# EAGLE board V7Print (EAGLE 5.12), part 1 of 2
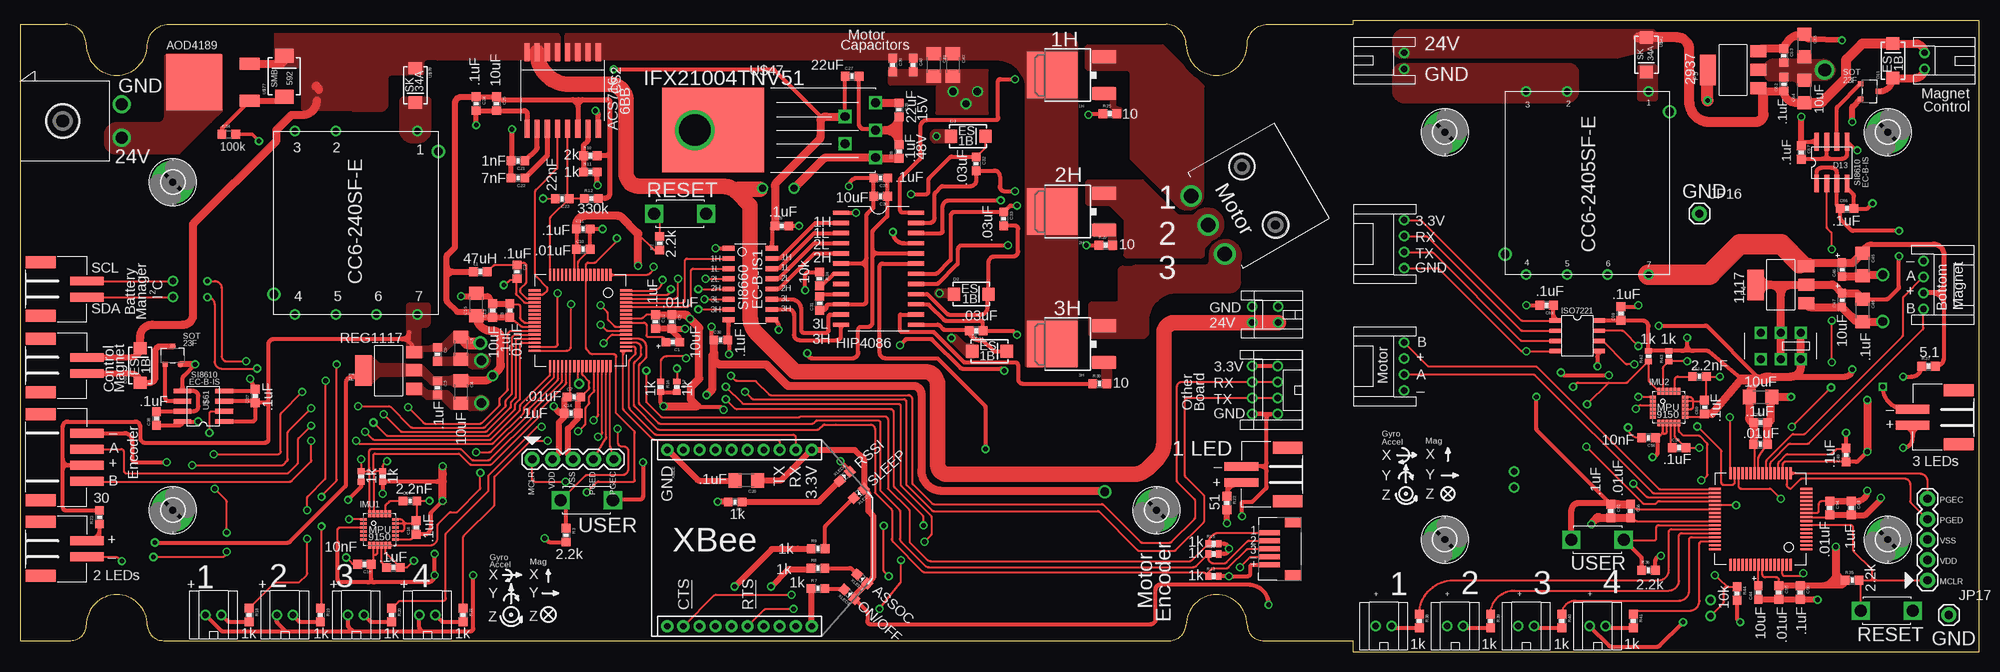
[diagram p0: board, top side]
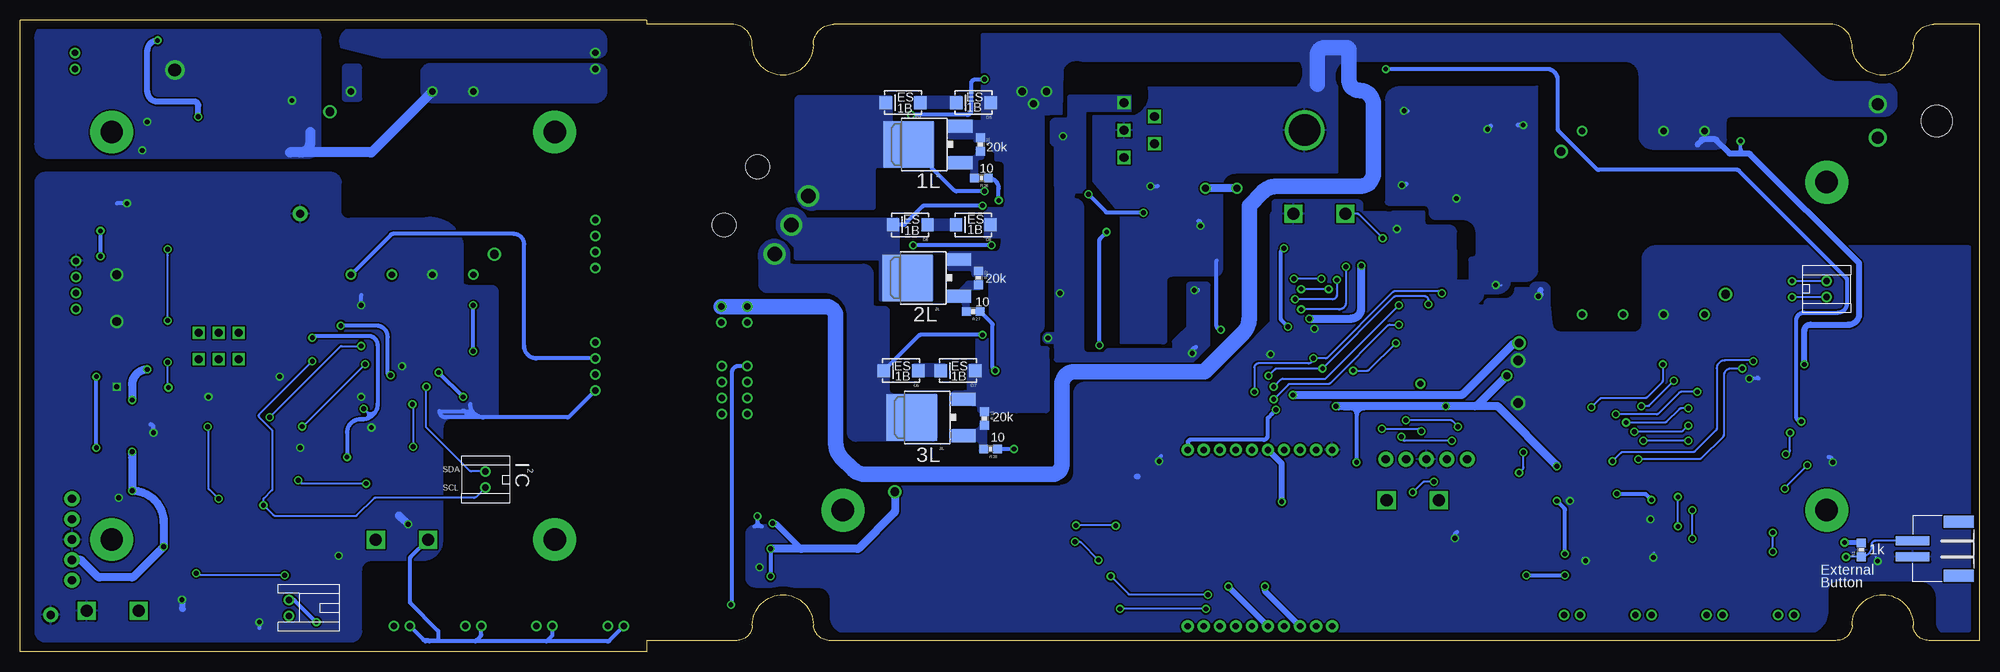
[diagram p1: board, bottom side, seen from below]

Size 244.35 x 78.74 mm. Coordinates in mm from the lower left corner, seen from the top.
Outline: 0,78.22 5.71,78.22 arc-90 8.25,75.68 arc180 15.87,75.68 arc-90 18.8,78.22 142.88,78.22 arc-90 145.41,75.68 arc180 153.03,75.68 arc-90 155.57,78.22 160.78,78.22 166.24,78.22 166.24,78.74 244.35,78.74 244.35,0 166.24,0 166.24,1.38 160.78,1.38 154.94,1.38 arc-90 153.03,3.29 arc180 145.41,3.29 arc-90 143.13,1.38 17.91,1.38 arc-90 15.87,3.29 arc180 8.25,3.29 arc-90 6.35,1.38 0,1.38 0,78.22
Copper layers (1*16): Top 0.035mm / dielectric 1.5mm / Bottom 0.035mm
Design rules "default": minimum track width 10mil, minimum drill 24mil, track to track 8mil, track to pad 8mil, pad to pad 8mil, via to via 8mil, smd to smd 8mil, copper to edge 40mil, drill to drill 8mil, minimum pad ring 10mil, minimum via ring 8mil, stop-mask expansion 4mil, vias tented up to drill 0mil, thermal gap 10mil

## Footprints (pad centres in the part's own frame; a part is rotated, then mirrored left to right if it is on the bottom)
DPAK = smd 5.791 x 6.274: D 0,1.587 | smd 1.6 x 3: G -2.286,-4.851; S 2.286,-4.851
JST-2-PH-SMD = smd 1.1 x 4.2: 1 -1,-7.7; 2 1,-7.7 | smd 1.5 x 3.7: P$1 -3.35,-1.95; P$4 3.35,-1.95
0603-POL = smd 1.1 x 1: + 0.85,0; - -0.85,0
0603 = smd 1.1 x 1.1: 1 -0.85,0; 2 0.85,0
1206 = smd 1.6 x 1.8: 1 -1.4,0; 2 1.4,0
SOIC16-W = smd 0.65 x 2.25: 1 -4.445,-4.75; 2 -3.175,-4.75; 3 -1.905,-4.75; 4 -0.635,-4.75; 5 0.635,-4.75; 6 1.905,-4.75; 7 3.175,-4.75; 8 4.445,-4.75; 9 4.445,4.75; 10 3.175,4.75; 11 1.905,4.75; 12 0.635,4.75; 13 -0.635,4.75; 14 -1.905,4.75; 15 -3.175,4.75; 16 -4.445,4.75
SMA-DIODE = smd 1.52 x 1.63: A -2.15,0; C 2.15,0
SOIC8-N = smd 2.2 x 0.6: 1 -2.6,1.905; 2 -2.6,0.635; 3 -2.6,-0.635; 4 -2.6,-1.905; 5 2.6,-1.905; 6 2.6,-0.635; 7 2.6,0.635; 8 2.6,1.905
SOIC-8 = smd 1.5 x 0.55: 1 -2.7,1.905; 2 -2.7,0.635; 3 -2.7,-0.635; 4 -2.7,-1.905; 5 2.7,-1.905; 6 2.7,-0.635; 7 2.7,0.635; 8 2.7,1.905
2,8-PAD = drill 2.8 pad 5.334 round: B2,8 0,0
LGA24_4X4 = smd 0.8 x 0.35: 1 -2,1.25; 2 -2,0.75; 3 -2,0.25; 4 -2,-0.25; 5 -2,-0.75; 6 -2,-1.25; 13 2,-1.25; 14 2,-0.75; 15 2,-0.25; 16 2,0.25; 17 2,0.75; 18 2,1.25 | smd 0.35 x 0.85: 7 -1.25,-1.975; 8 -0.75,-1.975; 9 -0.25,-1.975; 10 0.25,-1.975; 11 0.75,-1.975; 12 1.25,-1.975; 19 1.25,1.975; 20 0.75,1.975; 21 0.25,1.975; 22 -0.25,1.975; 23 -0.75,1.975; 24 -1.25,1.975
JST-4-PH-SMD = smd 1.1 x 4.2: 1 -3,-7.7; 2 -1,-7.7; 3 1,-7.7; 4 3,-7.7 | smd 1.5 x 3.7: P$1 -5.35,-1.95; P$2 5.35,-1.95
JST-5-SH = smd 0.6 x 2.7: 1 2,4; 2 1,4; 3 0,4; 4 -1,4; 5 -2,4 | smd 1.2 x 2: P$6 -3.3,1; P$7 3.3,1
JST-2-PH-TH = drill 0.8 round: 1 -1,-6.35; 2 1,-6.35
1X01_TEST = drill 0.762 round: 1 0,0
JST-2-PH-V = drill 0.8 round: 1 -1,0; 2 1,0
JST-4-PH-TH = drill 0.8 round: 1 -3,-6.35; 2 -1,-6.35; 3 1,-6.35; 4 3,-6.35
JST-4-PH-V = drill 0.8 round: 1 -3,0; 2 -1,0; 3 1,0; 4 3,0
TE-MINIMATENLOK-2 = drill 1.48 round: 1 -2.07,12.67; 2 2.07,12.67 | hole 3.91: 0,5.33
MOLEX-3-MINIFITJR-RA = drill 1.803 round: 1 4.191,13.538; 2 0,13.538; 3 -4.191,13.538 | hole 3: -4.204,6.248; 4.204,6.248
1X01 = drill 1.016 pad 1.88 round: 1 0,0
SOT23F = smd 0.6 x 0.65: D 0,1.125; G -0.95,-1.125; S 0.95,-1.125
SOIC24-W = smd 0.533 x 1.981: 1 -6.985,-4.686; 2 -5.715,-4.686; 3 -4.445,-4.686; 4 -3.175,-4.686; 5 -1.905,-4.686; 6 -0.635,-4.686; 7 0.635,-4.686; 8 1.905,-4.686; 9 3.175,-4.686; 10 4.445,-4.686; 11 5.715,-4.686; 12 6.985,-4.686; 13 6.985,4.686; 14 5.715,4.686; 15 4.445,4.686; 16 3.175,4.686; 17 1.905,4.686; 18 0.635,4.686; 19 -0.635,4.686; 20 -1.905,4.686; 21 -3.175,4.686; 22 -4.445,4.686; 23 -5.715,4.686; 24 -6.985,4.686
SOT223 = smd 1.499 x 2.007: 1 -2.261,-3.15; 2 0.025,-3.15; 3 2.311,-3.15 | smd 3.81 x 2.007: 4 0,3.15
CC6-2405SF-E = drill 0.8 round: 1 -11.43,7.62; 2 -11.43,-2.54; 3 -11.43,-7.62; 4 11.43,-7.62; 5 11.43,-2.54; 6 11.43,2.54; 7 11.43,7.62 | drill 1.1 round: P$9 8.89,-10.25; P$10 -8.89,10.25
1X05-PICKIT3 = drill 1.016 pad 1.88 round: MCLR 1.27,-1.016; PGEC 11.43,-1.016; PGED 8.89,-1.016; VDD 3.81,-1.016; VSS 6.35,-1.016
0402 = smd 0.7 x 0.9: 1 -0.65,0; 2 0.65,0
TACTILE_SWITCH = drill 1.5 square: 1 -3.25,0; 2 3.25,0
SLIDE_SWITCH = drill 1 square: 1 -2.489,1.651; 2 0,1.651; 3 2.489,1.651; 4 2.489,-1.651; 5 0,-1.651; 6 -2.489,-1.651
TQFP64_10X10 = smd 1.5 x 0.3: 1 -5.7,3.75; 2 -5.7,3.25; 3 -5.7,2.75; 4 -5.7,2.25; 5 -5.7,1.75; 6 -5.7,1.25; 7 -5.7,0.75; 8 -5.7,0.25; 9 -5.7,-0.25; 10 -5.7,-0.75; 11 -5.7,-1.25; 12 -5.7,-1.75; 13 -5.7,-2.25; 14 -5.7,-2.75; 15 -5.7,-3.25; 16 -5.7,-3.75; 33 5.7,-3.75; 34 5.7,-3.25; 35 5.7,-2.75; 36 5.7,-2.25; 37 5.7,-1.75; 38 5.7,-1.25; 39 5.7,-0.75; 40 5.7,-0.25; 41 5.7,0.25; 42 5.7,0.75; 43 5.7,1.25; 44 5.7,1.75; 45 5.7,2.25; 46 5.7,2.75; 47 5.7,3.25; 48 5.7,3.75 | smd 0.3 x 1.5: 17 -3.75,-5.7; 18 -3.25,-5.7; 19 -2.75,-5.7; 20 -2.25,-5.7; 21 -1.75,-5.7; 22 -1.25,-5.7; 23 -0.75,-5.7; 24 -0.25,-5.7; 25 0.25,-5.7; 26 0.75,-5.7; 27 1.25,-5.7; 28 1.75,-5.7; 29 2.25,-5.7; 30 2.75,-5.7; 31 3.25,-5.7; 32 3.75,-5.7; 49 3.75,5.7; 50 3.25,5.7; 51 2.75,5.7; 52 2.25,5.7; 53 1.75,5.7; 54 1.25,5.7; 55 0.75,5.7; 56 0.25,5.7; 57 -0.25,5.7; 58 -0.75,5.7; 59 -1.25,5.7; 60 -1.75,5.7; 61 -2.25,5.7; 62 -2.75,5.7; 63 -3.25,5.7; 64 -3.75,5.7
SOIC16-N = smd 0.6 x 1.55: 1 -4.445,-2.7; 2 -3.175,-2.7; 3 -1.905,-2.7; 4 -0.635,-2.7; 5 0.635,-2.7; 6 1.905,-2.7; 7 3.175,-2.7; 8 4.445,-2.7; 9 4.445,2.7; 10 3.175,2.7; 11 1.905,2.7; 12 0.635,2.7; 13 -0.635,2.7; 14 -1.905,2.7; 15 -3.175,2.7; 16 -4.445,2.7
TO220-5 = drill 1.1 square: 1 3.81,-3.404; 2 0,-1.702; 3 3.81,0; 4 0,1.702; 5 3.81,3.404 | smd 12.7 x 10.541: PAD -16.434,0 | drill 3.937 round: PAD2 -18.72,0
D-PAK = smd 7.01 x 7.01: D 0,0 | smd 1.499 x 2.515: G -2.286,-6.909; S 2.286,-6.909
SMB-DIODE = smd 1.75 x 2.3: A -2.54,0; C 2.54,0
XBEE-SILK = drill 0.8 pad 1.524 round: 1 -11,20; 2 -11,18; 3 -11,16; 4 -11,14; 5 -11,12; 6 -11,10; 7 -11,8; 8 -11,6; 9 -11,4; 10 -11,2; 11 11,2; 12 11,4; 13 11,6; 14 11,8; 15 11,10; 16 11,12; 17 11,14; 18 11,16; 19 11,18; 20 11,20
0603-DIODE = smd 1.1 x 1.1: AN -0.85,0; CAT 0.85,0

## Placement (x,y rotation side)
1H  IRLR024  [DPAK]  130.3,71.87 90 top
1L  IRLR024  [DPAK]  131.95,63.23 90 bottom
2H  IRLR024  [DPAK]  130.3,54.85 90 top
2L  IRLR024  [DPAK]  132.08,46.6 90 bottom
3H  IRLR024  [DPAK]  130.3,38.34 90 top
3L  IRLR024  [DPAK]  131.57,29.2 90 bottom
BUTTON  [JST-2-PH-SMD]  0.64,12.81 270 bottom
C1  10uF  [0603-POL]  81.41,38.6 180 top
C2  .1uF  [0603]  61.98,47.36 270 top
C3  .1uF  [0603]  52.07,32.88 270 top
C4  10uF  [1206]  54.99,32.37 270 top
C5  10uF  [1206]  54.99,37.83 270 top
C6  .1uF  [0603]  52.07,37.07 270 top
C7  .01uF  [0603]  69.09,31.74 0 top
C8  .01uF  [0603]  61.09,42.53 90 top
C9  .01uF  [0603]  81.28,41.14 270 top
C10  .01uF  [0603]  70.23,50.15 0 top
C11  .1uF  [0603]  70.23,52.69 0 top
C12  .1uF  [0603]  79.25,41.14 270 top
C13  .1uF  [0603]  58.93,42.53 90 top
C14  .1uF  [0603]  68.73,29.71 0 top
C15  10uF  [1206]  56.9,43.29 90 top
C16  .1uF  [0603]  49.4,15.48 90 top
C17  2.2nF  [0603]  48.64,18.78 0 top
C18  10nF  [0603]  42.94,10.91 180 top
C19  .1uF  [0603]  46.57,10.49 0 top
C20  .1uF  [1206]  90.56,21.32 180 top
C21  1nF  [0603]  62.1,61.2 180 top
C22  7nF  [0603]  62.1,59.04 180 top
C23  22nF  [0603]  67.6,56.46 180 top
C24  .1uF  [0603]  56.9,68.31 270 top
C25  10uF  [0603]  59.44,68.31 270 top
C26  .1uF 48V  [0603]  109.6,62.34 90 top
C27  22uF  [0603]  103.76,71.74 0 top
C28  22uF 15V  [0603]  109.6,67.55 270 top
C29  .1uF  [0603]  95,53.07 0 top
C30  .1uF  [0603]  87.38,38.85 0 top
C31  DNI  [0603]  99.7,43.42 90 top
C32  .03uF 15V  [0603]  119.25,60.82 270 top
C33  .03uF 15V  [0603]  122.68,53.96 270 top
C34  .03uF 15V  [0603]  119.25,39.99 180 top
C35  .1uF  [0603]  107.31,59.04 180 top
C36  10uF  [0603]  107.31,56.76 180 top
C37  .1uF  [0603]  29.34,31.86 90 top
C38  .1uF  [0603]  17.02,29.07 90 top
C39  .01uF  [0603]  108.84,73.14 270 top
C40  .1uF  [0603]  111.38,73.14 270 top
C41  1uF  [1206]  113.92,73.14 270 top
C42  10uF  [1206]  116.33,73.14 270 top
C43  .1uF  [0603]  228.35,17.91 270 top
C44  10uF  [0603-POL]  216.79,7.37 90 top
C45  .1uF  [1206]  229.74,48.26 270 top
C46  10uF  [0603-POL]  227.2,47.62 90 top
C47  10uF  [0603-POL]  227.2,43.81 90 top
C48  .1uF  [1206]  229.74,42.55 270 top
C49  .1uF  [0603]  227.71,24.51 90 top
C50  .1uF  [0603]  222,7.37 270 top
C51  .1uF  [0603]  198.37,17.53 270 top
C52  .1uF  [0603]  217.04,28.57 0 top
C53  .01uF  [0603]  217.03,25.84 0 top
C54  .01uF  [0603]  225.68,17.91 270 top
C55  .01uF  [0603]  219.33,7.37 270 top
C56  .01uF  [0603]  200.84,17.53 270 top
C57  10uF  [1206]  217.04,31.75 0 top
C58  10nF  [0603]  203.07,26.67 180 top
C59  .1uF  [0603]  206.88,25.4 0 top
C60  .1uF  [0603]  210.06,30.48 90 top
C61  2.2nF  [0603]  209.42,34.29 0 top
C62  .1uF 24V  [0603]  219.96,70.74 90 top
C63  .1uF 24V  [0603]  219.96,74.3 270 top
C64  10uF 24V  [1206]  222.5,69.85 90 top
C65  10uF 24V  [1206]  222.5,75.56 270 top
C66  .1uF  [0603]  227.84,55.24 0 top
C67  .1uF  [0603]  222.12,62.23 270 top
C68  .1uF  [0603]  190.37,43.18 180 top
C69  .1uF  [0603]  199.64,42.16 90 top
CS2  ACS716KLATR-6BB-T  [SOIC16-W]  67.67,69.96 180 top
D1  ES1B  [SMA-DIODE]  120.9,37.45 0 top
D2  ES1B  [SMA-DIODE]  118.62,44.56 0 top
D3  ES1B  [SMA-DIODE]  118.24,64.25 0 top
D4  ES1B  [SMA-DIODE]  134.24,68.44 180 bottom
D5  ES1B  [SMA-DIODE]  125.45,68.44 180 bottom
D6  ES1B  [SMA-DIODE]  134.49,35.04 180 bottom
D7  ES1B  [SMA-DIODE]  127.38,35.04 180 bottom
D8  ES1B  [SMA-DIODE]  133.35,53.2 180 bottom
D9  ES1B  [SMA-DIODE]  125.48,53.2 180 bottom
D10  ES1B  [SMA-DIODE]  14.99,35.67 90 top
D11  ES1B  [SMA-DIODE]  233.55,73.66 90 top
D13  DIGITAL-ISOLATOR-1CHSOIC8-N  [SOIC8-N]  225.93,60.96 90 top
D15  ISO7221SMD  [SOIC-8]  194.18,39.37 0 top
H1  MOUNT-PAD-ROUND2.8  [2,8-PAD]  19.05,58.53 0 top
H2  MOUNT-PAD-ROUND2.8  [2,8-PAD]  19.05,17.64 0 top
H3  MOUNT-PAD-ROUND2.8  [2,8-PAD]  141.73,17.64 0 top
H4  MOUNT-PAD-ROUND2.8  [2,8-PAD]  177.67,64.77 0 top
H5  MOUNT-PAD-ROUND2.8  [2,8-PAD]  232.92,64.77 0 top
H6  MOUNT-PAD-ROUND2.8  [2,8-PAD]  177.67,13.97 0 top
H7  MOUNT-PAD-ROUND2.8  [2,8-PAD]  232.92,13.97 0 top
IMU1  MPU-9150  [LGA24_4X4]  44.83,15.23 0 top
IMU2  MPU-9150  [LGA24_4X4]  205.61,30.48 0 top
J2  [JST-4-PH-SMD]  0.64,24.24 90 top
J5  [JST-5-SH]  159.77,12.81 90 top
J7  [JST-2-PH-TH]  160.02,42.02 270 top
JP1  M01TEST  [1X01_TEST]  69.72,33.39 0 top
JP2  [JST-2-PH-SMD]  0.64,45.2 90 top
JP3  [JST-2-PH-V]  19.05,45.2 90 bottom
JP4  [JST-4-PH-TH]  160.02,32.63 270 top
JP5  [JST-4-PH-V]  156.84,32.63 270 top
JP6  [JST-2-PH-V]  24.13,4.56 180 top
JP7  [JST-2-PH-V]  33.02,4.56 180 top
JP8  [JST-2-PH-V]  41.91,4.56 180 top
JP9  [JST-2-PH-V]  50.8,4.56 180 top
JP10  [TE-MINIMATENLOK-2]  0,66.15 270 top
JP11  [JST-2-PH-SMD]  160.02,22.09 270 top
JP12  [JST-2-PH-V]  156.92,42.02 270 top
JP13  [JST-2-PH-SMD]  0.64,12.81 90 top
JP14  [JST-2-PH-SMD]  0.64,35.67 90 top
JP15  [MOLEX-3-MINIFITJR-RA]  159.88,59.96 120 top
JP16  M01PTH  [1X01]  209.42,54.61 0 top
JP17  M01PTH  [1X01]  240.54,4.57 0 top
JP18  [JST-2-PH-SMD]  243.71,29.21 270 top
JP19  [JST-2-PH-V]  178.94,3.17 180 top
JP20  [JST-2-PH-V]  187.83,3.17 180 top
JP21  [JST-2-PH-V]  170.05,3.17 180 top
JP22  [JST-2-PH-V]  196.72,3.17 180 top
JP23  [JST-2-PH-V]  186.31,21.46 270 bottom
JP24  [JST-4-PH-TH]  166.24,35.56 90 top
JP25  [JST-4-PH-TH]  243.71,45.72 270 top
JP26  [JST-2-PH-TH]  243.84,73.66 270 top
JP27  [JST-4-PH-TH]  166.24,50.8 90 top
JP28  [JST-2-PH-TH]  166.24,73.66 90 top
JP29  [JST-2-PH-TH]  204.47,5.46 270 bottom
L1  47uH  [0603]  57.4,47.36 0 top
M1  N-MOSSOT23F  [SOT23F]  19.05,36.94 0 top
M2  N-MOSSOT23F  [SOT23F]  230.63,69.85 270 top
MD1  HIP4086  [SOIC24-W]  107.06,47.74 270 top
P1  LINEAR-REG1117  [SOT223]  45.97,35.04 90 top
P2  DC-DC-CONVERTER1.2A  [CC6-2405SF-E]  41.91,53.45 270 top
P3  DC-DC-CONVERTER1.2A  [CC6-2405SF-E]  195.45,58.42 270 top
P4  LINEAR-REG1117  [SOT223]  219.58,45.72 90 top
P5  LINEAR-REGLM2937  [SOT223]  213.61,72.52 90 top
PROG  [1X05-PICKIT3]  62.61,25.01 0 top
PROG_1  [1X05-PICKIT3]  236.85,7.62 90 top
R1  1k  [0603]  14.73,12.69 90 bottom
R2  2.2k  [0603]  79.76,50.91 90 top
R3  2.2k  [0603]  68.11,14.52 270 top
R4  10k  [0402]  42.54,21.83 270 top
R5  10k  [0402]  45.21,21.83 270 top
R6  1k  [0603]  89.18,18.66 180 top
R7  1k  [0603]  99.5,7.86 0 top
R8  1k  [0603]  99.5,10.4 0 top
R9  1k  [0603]  99.52,12.83 0 top
R10  2k  [0603]  71.12,61.84 0 top
R11  1k  [0603]  71.12,59.8 0 top
R12  330k  [0603]  71.25,56.5 0 top
R13  1k  [0402]  148.84,9.39 0 top
R14  1k  [0402]  148.84,12.18 0 top
R15  1k  [0402]  148.84,13.45 0 top
R16  1k  [0402]  79.88,33.01 270 top
R17  1k  [0402]  81.92,33.01 270 top
R18  1k  [0603]  28.58,4.56 270 top
R19  1k  [0603]  37.46,4.56 270 top
R20  1k  [0603]  46.35,4.56 270 top
R21  1k  [0603]  55.24,4.56 270 top
R22  51  [0603]  150.5,18.53 270 top
R23  30  [0603]  9.91,16.75 90 top
R24  10k  [0603]  99.7,46.47 270 top
R25  10  [0603]  135.89,67.04 0 top
R26  10  [0603]  124.46,59.04 180 bottom
R27  10  [0603]  125.48,42.41 180 bottom
R28  10  [0603]  123.32,25.26 180 bottom
R29  10  [0603]  135.38,50.66 0 top
R30  10  [0603]  134.62,33.39 0 top
R31  20k  [0603]  124.59,63.23 270 bottom
R32  20k  [0603]  124.84,46.6 270 bottom
R33  20k  [0603]  124.08,29.07 270 bottom
R34  100k  [0603]  26.04,64.52 0 top
R35  2.2k  [0603]  228.47,8.89 0 top
R36  2.2k  [0603]  203.07,10.16 0 top
R37  5.1  [0603]  238,35.56 0 top
R38  1k  [0603]  174.5,3.81 270 top
R39  1k  [0603]  183.39,3.81 270 top
R40  1k  [0603]  192.28,3.81 270 top
R41  1k  [0603]  201.17,3.81 270 top
R42  10k  [0402]  203.07,36.83 90 top
R43  10k  [0402]  205.61,36.83 90 top
R44  10k  [0603]  214.12,7.24 270 top
RESET1  TACTILE_SWITCH  [TACTILE_SWITCH]  82.3,54.6 0 top
RESET2  TACTILE_SWITCH  [TACTILE_SWITCH]  232.79,5.08 0 top
SW1  SLIDE_SWTHROUGHHOLE  [SLIDE_SWITCH]  219.58,38.1 180 top
U$1  DSPIC33EP512MC806  [TQFP64_10X10]  69.85,41.26 270 top
U$2  DSPIC33EP512MC806  [TQFP64_10X10]  217.04,16.51 180 top
U$42  SK34A  [SMA-DIODE]  202.82,74.42 270 top
U$46  DIGITAL-ISOLATOR-6CHSI8660EC-B-IS1  [SOIC16-N]  91.06,45.83 270 top
U$47  IFX21004TNV51  [TO220-5]  102.87,65.01 0 top
U$61  DIGITAL-ISOLATOR-1CHSOIC8-N  [SOIC8-N]  22.86,30.59 180 top
U$75  AOD4189  [D-PAK]  21.73,70.99 90 top
U$77  10V  [SMB-DIODE]  32.94,71.73 90 top
U$78  SK34A  [SMA-DIODE]  49.3,70.6 270 top
USER  TACTILE_SWITCH  [TACTILE_SWITCH]  196.72,13.97 0 top
USER1  TACTILE_SWITCH  [TACTILE_SWITCH]  70.68,18.86 180 top
XBEE  XBEETH  [XBEE-SILK]  78.73,14.16 270 top
XLED1  [0603-DIODE]  103.43,7.15 138 top
XLED2  [0603-DIODE]  104.58,19.72 222 top
XLED3  [0603-DIODE]  105.02,9.07 138 top
XLED4  [0603-DIODE]  102.83,21.86 42 top

## Library data of the parts
1H 1L 2H 2L 3H 3L BUTTON C1-C69 CS2 D1-D11 D13 H1-H7 IMU1 IMU2 J2 J5 J7 JP1-JP29 L1 M1 M2 MD1 P1-P5 PROG PROG_1 R1-R33 R35-R44 RESET1 RESET2 SW1 U$1 U$2 U$42 U$46 U$47 U$61 U$78 USER USER1 XBEE XLED1-XLED4 = GibbotV5
D15 U$75 = GibbotV6
R34 U$77 = Gibbot v4

## Nets
1HO: 1H.G R25.2
1HS: 1H.S 1L.D C32.2 D4.C JP15.1 MD1.23
1LO: 1L.G R26.2 R31.2
2HO: 2H.G R29.2
2HS: 2H.S 2L.D C33.1 D8.C JP15.2 MD1.18
2LO: 2L.G R27.2 R32.2
3.3V: C3.1 C4.1 C7.1 C8.1 C9.1 C10.1 C11.1 C12.1 C13.1 C14.1 C15.1 C16.1 C18.1 C20.1 C24.1 C25.1 CS2.14 IMU1.3 IMU1.8 IMU1.9 IMU1.13 JP4.1 JP5.1 JP6.2 JP7.2 JP8.2 JP9.2 L1.1 P1.2 P1.4 PROG.VDD R1.2 R2.1 R4.2 R5.2 R10.2 R12.2 R16.2 R17.2 U$1.10 U$1.26 U$1.38 U$1.57 USER1.1 XBEE.1 XLED1.AN XLED2.AN XLED3.AN
3.3V1: C43.1 C49.1 C50.1 C51.1 C52.1 C53.1 C54.1 C55.1 C56.1 C57.1 C58.1 C60.1 C69.1 D15.8 IMU2.3 IMU2.8 IMU2.9 IMU2.13 JP19.2 JP20.2 JP21.2 JP22.2 JP29.1 PROG_1.VDD R35.1 R42.2 R43.2 SW1.1 SW1.6 U$2.10 U$2.19 U$2.26 U$2.38 U$2.57 USER.1
3HO: 3H.G R30.2
3HS: 3H.S 3L.D C34.1 D6.C JP15.3 MD1.15
3LO: 3L.G R28.2 R33.2
5V: C45.1 C46.+ JP24.3 JP25.3 P3.7 P4.3 R37.2
5V1: C27.1 C29.1 C38.1 U$46.16 U$47.4 U$61.8
5V2: C5.1 C6.1 C30.1 C37.1 J2.2 J5.5 P1.3 P2.7 R13.2 R14.2 R15.2 R22.2 R23.2 U$46.1 U$61.1 U$61.3
15V: C28.1 C35.1 C36.1 D1.A D2.A D3.A MD1.20 R24.1 U$47.5
24V: C26.1 CS2.5 CS2.6 CS2.7 CS2.8 D10.C J7.2 JP12.2 JP14.2 U$47.1 U$75.S U$77.C U$78.A
24V1: C62.1 C64.1 D11.C JP26.1 JP28.2 P5.1 U$42.A
CTS: U$1.54 XBEE.12
FAULT: C23.1 CS2.13 R12.1 U$1.16
GND1: 1L.S 2L.S 3L.S C26.2 C27.2 C28.2 C29.2 C31.1 C35.2 C36.2 C38.2 C39.2 C40.2 C41.2 C42.2 D5.A D7.A D9.A J7.1 JP10.1 JP12.1 M1.S MD1.6 MD1.10 P2.2 P2.3 R31.1 R32.1 R33.1 R34.2 U$46.9 U$47.3 U$47.PAD U$47.PAD2 U$61.5 U$61.7
GND2: BUTTON.2 C1.- C2.2 C3.2 C4.2 C5.2 C6.2 C7.2 C8.2 C9.2 C10.2 C11.2 C12.2 C13.2 C14.2 C15.2 C16.2 C17.2 C18.2 C19.2 C20.2 C21.2 C22.2 C23.2 C24.2 C25.2 C30.2 C37.2 CS2.9 CS2.16 IMU1.1 IMU1.11 IMU1.15 IMU1.17 IMU1.18 J2.4 J5.4 JP4.4 JP5.4 JP11.1 JP13.1 P1.1 P2.5 PROG.VSS R3.2 R11.2 RESET1.2 U$1.9 U$1.20 U$1.25 U$1.41 U$46.8 U$61.4 XBEE.10 XLED4.CAT
GND3: C43.2 C44.- C45.2 C46.- C47.- C48.2 C49.2 C50.2 C51.2 C52.2 C53.2 C54.2 C55.2 C56.2 C57.2 C58.2 C59.2 C60.2 C61.2 C66.2 C69.2 D13.4 D15.5 IMU2.1 IMU2.11 IMU2.15 IMU2.17 IMU2.18 JP16.1 JP17.1 JP18.1 JP24.1 JP25.1 P3.5 P4.1 PROG_1.VSS R36.2 R44.2 RESET2.2 U$2.9 U$2.20 U$2.25 U$2.41
GND4: C62.2 C63.2 C64.2 C65.2 C67.2 D13.5 D13.7 JP28.1 M2.S P3.2 P3.3 P5.2 P5.4
HALL1: J5.1 R15.1 U$1.53
HALL2: J5.2 R14.1 U$1.52
HALL3: J5.3 R13.1 U$1.51
I_SENSE: CS2.12 U$1.18
IMU_INT1: IMU1.12 U$1.35
IMU_INT2: IMU2.12 U$2.35
LED1: R18.1 U$1.28
LED2: R19.1 U$1.27
LED3: R20.1 U$1.45
LED4: R21.1 U$1.46
LED5: R41.1 U$2.46
LED6: R40.1 U$2.45
LED7: R39.1 U$2.44
LED8: R38.1 U$2.43
LOW_MAG: D13.2 U$2.30
LOW_MAGA: JP25.2 U$2.23
LOW_MAGB: JP25.4 U$2.22
MCLR1: PROG.MCLR R2.2 RESET1.1 U$1.7
MCLR_2: PROG_1.MCLR R35.2 RESET2.1 U$2.7
MOT_TEMP: JP29.2 R44.1 U$2.62
MOTA: JP24.2 U$2.34
MOTB: JP24.4 U$2.33
MOTOR+: 1H.D 2H.D 3H.D C39.1 C40.1 C41.1 C42.1 CS2.1 CS2.2 CS2.3 CS2.4
N$1: C44.+ U$2.56
N$2: R7.2 XLED1.CAT
N$3: R8.2 XLED3.CAT
N$4: C1.+ U$1.56
N$5: R9.2 XLED2.CAT
N$6: C2.1 L1.2 U$1.19
N$7: JP10.2 U$75.D
N$8: BUTTON.1 R1.1 U$1.30
N$9: JP1.1 U$1.40
N$10: C47.+ C48.1 P4.2 SW1.2 SW1.5
N$11: P4.4
N$12: P2.1 U$78.C
N$13: JP18.2 R37.1
N$14: JP22.1 R41.2
N$15: R34.1 U$75.G U$77.A
N$16: C17.1 IMU1.20
N$17: JP20.1 R40.2
N$18: C19.1 IMU1.10
N$19: R6.2 XBEE.6
N$20: R6.1 XLED4.AN
N$21: R7.1 XBEE.20
N$22: JP19.1 R39.2
N$23: JP21.1 R38.2
N$24: C59.1 IMU2.10
N$25: R8.1 XBEE.15
N$26: R9.1 XBEE.13
N$27: C61.1 IMU2.20
N$28: CS2.15 R10.1 R11.1
N$29: C21.1 CS2.10
N$30: C63.1 C65.1 C67.1 D13.8 P5.3
N$31: C22.1 CS2.11
N$32: JP6.1 R18.2
N$33: D13.6 M2.G
N$34: JP7.1 R19.2
N$35: JP8.1 R20.2
N$36: JP9.1 R21.2
N$37: D11.A JP26.2 M2.D
N$38: MD1.24 R25.1
N$39: MD1.22 R26.1
N$40: MD1.21 R27.1
N$41: MD1.19 R28.1
N$42: MD1.17 R29.1
N$43: JP11.2 R22.1
N$44: JP13.2 R23.1
N$45: MD1.14 R30.1
N$46: C68.1 D15.1 JP27.4
N$47: C31.2 MD1.9
N$48: MD1.7 R24.2
N$49: D4.A D5.C
N$50: D6.A D7.C
N$51: D8.A D9.C
N$52: C32.1 D3.C MD1.1
N$53: D15.2 JP27.3
N$54: D15.3 JP27.2
N$55: C34.2 D1.C MD1.13
N$56: C33.2 D2.C MD1.16
N$57: M1.G U$61.6
N$58: D10.A JP14.1 M1.D
N$59: C68.2 D15.4 JP27.1
N$60: P3.1 U$42.C
PGEC1_2: PROG_1.PGEC U$2.17
PGEC2: PROG.PGEC U$1.48
PGED1_2: PROG_1.PGED U$2.18
PGED2: PROG.PGED U$1.47
PRE3.3: C66.1 D13.1 D13.3
PWM1H: U$1.61 U$46.2
PWM1HO: MD1.2 U$46.15
PWM1L: U$1.60 U$46.3
PWM1LO: MD1.3 U$46.14
PWM2H: U$1.63 U$46.5
PWM2HO: MD1.5 U$46.12
PWM2L: U$1.62 U$46.4
PWM2LO: MD1.4 U$46.13
PWM3H: U$1.1 U$46.7
PWM3HO: MD1.12 U$46.10
PWM3L: U$1.64 U$46.6
PWM3LO: MD1.11 U$46.11
RTS: U$1.55 XBEE.16
RX1: U$1.50 XBEE.2
RX2: JP4.2 JP5.2 R17.1 U$1.32
RX3: D15.6 U$2.31
SCL1: IMU1.23 JP2.2 JP3.2 R5.1 U$1.37
SCL2: IMU2.23 JP23.2 R43.1 U$2.37
SDA1: IMU1.24 JP2.1 JP3.1 R4.1 U$1.36
SDA2: IMU2.24 JP23.1 R42.1 U$2.36
TOPMAGA: J2.3 U$1.33
TOPMAGB: J2.1 U$1.34
TOPMAGCON: U$1.29 U$61.2
TX1: U$1.49 XBEE.3
TX2: JP4.3 JP5.3 R16.1 U$1.31
TX3: D15.7 U$2.32
USER: R3.1 U$1.44 USER1.2
USER1: R36.1 U$2.42 USER.2

## Tracks (layer width: path | path; a pad name or v marks a point on that pad's centre or on a via)
1HO
  pour Top (no thermals): 136.14,69.84 135.64,69.84 arc90 135.25,69.46
  pour Top (no thermals): 133.98,70.35 136.27,70.35 arc-90 136.52,70.09 136.52,68.31 arc90 137.03,67.81 137.16,67.81 arc-90 137.29,67.68 137.29,66.79 arc-90 137.16,66.66 136.52,66.66 arc-90 136.27,66.92 136.27,67.55 136.11,67.71 arc-45 136.02,67.94 136.02,68.82 134.24,68.82 arc-90 133.86,69.2
1HS  (via drill 0.6)
  Top 0.508: MD1.23 113.41,53.45 arc90 114.05,54.09 114.05,57.01 arc-45 114.14,57.23 114.84,57.93 arc-45 115.07,58.03 118.49,58.03 arc90 119.25,58.79 C32.2 121.5,59.97 arc-90 122.17,59.3 122.17,58.03 arc90 122.81,57.39 v124.08,57.39
  Bottom 0.508: v124.08,57.39 127.57,57.39 arc45 127.79,57.48 1L.D
  pour Bottom (no thermals): 130.68,66.03 arc90 130.56,65.9 130.56,60.57 arc90 130.68,60.44
  pour Top (no thermals): 144.27,58.56 arc-90 146.94,58.56 arc-90 146.94,55.64 arc-90 144.27,55.64 arc-90
  pour Bottom (no thermals): 144.27,58.56 arc-90 146.94,58.56 arc-90 146.94,55.64 arc-90 144.27,55.64 arc-90
  pour Bottom (no thermals): 133.22,65.9 130.56,65.9 130.56,65.39 130.56,60.44 131.32,60.44
  pour Bottom (no thermals): 130.81,65.9 arc90 130.56,65.65 130.56,60.95 arc90 130.94,60.57
  pour Bottom (no thermals): 130.94,65.9 arc90 130.56,65.52 130.56,60.95 arc90 131.06,60.44
  pour Top (no thermals): 135.23,75.56 133.25,75.56 arc90 132.88,75.2 132.88,72.95 arc90 133.29,72.54 137.96,72.54 arc-90 138.49,72.01 138.49,61.57 arc45 138.59,61.35 144.37,55.56 144.37,55.75 arc-45 144.47,55.97 147.02,58.52 147.02,58.03 arc-45 146.92,57.81 146.23,57.11 147.59,57.11 147.59,70.42 arc45 147.49,70.64 142.54,75.59
  pour Bottom (no thermals): 147.22,69.28 135.86,69.28 arc90 135.69,69.1 135.69,66.31 arc-90 135.43,66.05 130.56,66.05 arc90 130.43,65.93 130.43,60.64 arc90 130.66,60.41 137.43,60.41 arc-90 137.77,60.07 137.77,55.47 arc90 138.1,55.14 145.49,55.14 arc90 145.9,55.55 145.9,56.35 arc-90 146.67,57.12 147.47,57.12 arc90 147.62,57.28 147.62,68.64 arc90
1LO
  pour Bottom (no thermals): 124.59,62.85 124.84,62.85 arc-90 125.09,62.6 125.09,62.22 arc90 125.6,61.71 128.27,61.71 arc-90 128.4,61.58 128.4,60.44 arc-90 128.27,60.31 125.86,60.31 arc90 125.73,60.19 125.73,58.79 arc-90 125.6,58.66 125.09,58.66 arc-90 124.97,58.79 124.97,61.07 arc90 124.59,61.46 124.46,61.46 arc-90 124.21,61.71 124.21,62.73 arc-90 124.33,62.85
2HO
  pour Top (no thermals): 136.27,50.15 136.4,50.15 arc90 136.65,50.41 136.65,53.07 arc90 136.4,53.33 133.98,53.33 arc90 133.86,53.2 133.86,51.93 arc90 133.98,51.8 135.51,51.8 arc-90 135.76,51.55 135.76,50.28 arc90 135.89,50.15
2HS  (via drill 0.6)
  Top 0.508: MD1.18 114.17,47.1 arc45 114.39,47.2 115.98,48.79 arc45 116.08,49.01 116.08,54.34 arc-90 116.55,54.81 C33.1 123.39,55.52 arc-45 123.62,55.61 v124.33,55.61
  Bottom 0.508: D8.C 134.24,53.2 arc-45 134.02,53.29 131.79,55.52 arc45 131.57,55.61 v124.33,55.61
  pour Top (no thermals): 146.76,54.74 arc-90 149.43,54.74 arc-90 149.43,51.82 arc-90 146.76,51.82 arc-90
  pour Bottom (no thermals): 146.76,54.74 arc-90 149.43,54.74 arc-90 149.43,51.82 arc-90 146.76,51.82 arc-90
  pour Top (no thermals): 147.02,55.03 146.32,54.33 arc-45 146.1,54.24 142.65,54.24 138.46,58.43 arc45 138.23,58.52 135.81,58.52 133.39,58.52 arc90 133.03,58.17 133.03,56.05 arc90 133.39,55.69 135.77,55.69 arc-45 136,55.6 139.61,51.98 140.22,51.38 arc45 140.44,51.28 148.42,51.28 147.2,52.51 arc-45 147.1,52.73 147.1,54.94
  pour Top (no thermals): 135.69,55.69 137.34,55.69 arc-90 137.71,55.32 137.71,49.53 arc90 138.05,49.19 147.29,49.19 arc90 147.64,49.53 147.64,51.04 arc-90 147.88,51.28 147.88,53.82 arc90 147.33,54.37 144.53,54.37 arc-45 144.31,54.46 140.04,58.72 133.26,58.72 arc90 132.96,58.42 132.96,56.06 arc90 133.32,55.69
  pour Top (no thermals): 147.65,49.99 147.65,50.19 arc-45 147.74,50.41 149.21,51.88 149.21,52.75 arc45 149.12,52.98 147.22,54.88 147.22,54.04 arc-45 147.13,53.82 145.57,52.26 145.57,52.05 arc45 145.66,51.82 147.43,50.05
  pour Bottom (no thermals): 135.6,54.04 135.03,54.04 arc90 134.77,53.78 134.77,49.83 arc-90 134.4,49.47 130.78,49.47 arc90 130.54,49.23 130.54,43.92 arc90 130.72,43.74 136.94,43.74 arc90 137.1,43.89 137.1,48.58 arc-90 137.4,48.88 147.47,48.88 arc90 147.73,49.14 147.73,50.38 149.05,51.7 149.05,54.06 arc90 147.82,55.3 147.82,55.04 147.08,54.31 146.81,54.04 135.66,54.04
2LO
  pour Bottom (no thermals): 127.25,45.07 128.14,45.07 arc-90 128.52,44.69 128.52,43.93 arc-90 128.27,43.68 127.25,43.68 arc90 126.75,43.17 126.75,42.28 arc-90 126.49,42.02 126.11,42.02 arc-90 125.98,42.15 125.98,44.95 arc90 125.73,45.2 124.71,45.2 arc-90 124.46,45.45 124.46,45.96 arc-90 124.59,46.09 126.11,46.09 arc-45 126.33,46
3.3V  (via drill 0.6, 0.9)
  Top 0.254: U$1.10 69.1,49.74 arc-45 69.19,49.96 C10.1 | U$1.57 77.33,41.51 arc45 77.78,41.7 78.01,41.93 arc-45 78.24,42.02 79.15,42.02 arc-45 C12.1 | 67.97,32.02 arc45 68.06,31.79 C7.1 | 77.09,52.06 78.99,50.16 arc45 79.21,50.06 R2.1 | C8.1 62.42,40.61 arc45 62.64,40.51 U$1.26 | C15.1 56.9,42.32 | IMU1.13 48.62,13.98 arc45 48.84,14.07 C16.1 | 44.08,11.93 44.08,11.33 arc-45 43.99,11.11 C18.1 | 44.08,11.93 IMU1.8 | IMU1.9 44.58,12.43 arc-90 44.21,12.05 arc90 44.08,11.93 | IMU1.3 39.87,15.48 arc90 39.62,15.23 39.62,13.58 | C7.1 arc-45 68.2,31.83 | U$1.38 68.6,32.23 arc-45 68.51,32.01 C7.1
  Top 0.508: JP4.1 JP5.1 | v155.7,5.83 arc90 153.16,8.37 142.24,8.37 arc90 141.6,7.73 141.6,4.05 arc-90 140.97,3.42 106.05,3.42 arc-90 105.66,3.8 105.66,4.85 arc45 105.57,5.07 XLED1.AN | P1.4 arc90 42.8,35.01 42.8,34.4 arc-90 42.67,34.28 41.4,34.28 | C11.1 C10.1 | 41.4,34.28 arc90 42.16,35.04 42.16,33.9 arc-90 42.29,33.77 42.29,33.39 arc90 41.4,34.28 | C16.1 50.46,14.63 arc90 51.18,15.35 51.18,17.13 arc-45 51.27,17.35 v52.7,18.78 arc90 52.8,18.88 52.8,20.27 arc90 51.89,21.18 R5.2 v45.21,19.67 | 43.79,9.03 C18.1 | 44.2,8.62 arc-90 43.79,9.03 | 44.2,8.62 50.8,8.62 arc90 v51.69,9.51 v51.69,12.18 | 39.62,13.58 39.62,9 arc90 40,8.62 44.2,8.62 | 43.79,9.03 arc-90 43.38,8.62 | v40.89,18.91 42.45,20.47 arc45 42.54,20.69 R4.2 | 41.4,34.28 arc90 40.64,33.52 40.64,20.82 arc-45 40.55,20.6 33.65,13.69 arc-45 33.42,13.6 v16.83,13.6 arc45 16.89,13.58 | R17.2 R16.2 79.88,31.11 arc45 79.98,30.88 v80.26,30.59 | v56.52,9.51 56.52,2.91 arc-90 56.13,2.53 50.16,2.53 | 33.15,2.53 25.29,2.53 arc-45 25.07,2.62 JP6.2 | 33.15,2.53 41.53,2.53 | 41.53,2.53 50.16,2.53 | JP7.2 32.02,3.79 arc45 32.11,3.56 33.15,2.53 | JP8.2 40.91,3.28 arc45 41,3.05 41.53,2.53 | JP9.2 49.8,3.02 arc45 49.89,2.8 50.16,2.53 | 84.45,30.59 arc90 84.55,30.5 87.27,30.5 arc-45 87.5,30.41 v87.74,30.17 | 52.7,21.2 arc-90 52.69,21.18 | 52.7,22.15 arc-90 51.74,21.18 | v77.67,23.6 77.67,19.32 arc-90 77.32,18.96 74.03,18.96 arc90 USER1.1
  Top 0.61: C24.1 C25.1 59.68,68.91 arc45 59.91,68.82 68.96,68.82 | R12.2 72.9,56.5 arc90 73.53,57.14 73.53,62.09 | R10.2 73.02,61.84 arc45 73.47,62.02 73.53,62.09 | 68.96,68.82 69.6,68.82 | 70.1,68.82 73.28,68.82 arc-90 73.53,68.57 73.53,62.09 | 69.57,67.95 arc45 69.39,68.4 68.96,68.82 | 69.57,67.95 69.57,68.03 | 69.76,68.47 arc45 69.57,68.03 | 70.1,68.82 69.76,68.47 | 69.6,68.82 70.1,68.82 | 69.6,68.82 69.6,68.31 | 69.57,67.95 CS2.14 | 69.76,68.47 arc45 69.57,68.03
  Top 0.762: C8.1 C13.1 57.24,41.68 arc-45 57.02,41.77 C15.1 | 57.32,42.32 56.9,42.32 54.7,42.32 arc-45 54.48,42.41 53.31,43.58 arc-45 53.21,43.81 53.21,46.85 | 53.21,46.85 53.21,47.61 | 53.21,46.85 53.53,47.17 arc-45 53.98,47.36 53.85,47.36 arc-90 53.21,47.99 | 53.21,47.61 53.21,47.99 | 53.21,47.61 arc90 53.34,47.48 arc90 53.59,47.23 53.59,47.36 L1.1 | C24.1 55.08,69.16 arc90 54.23,68.31 54.23,50.54 arc-45 54.14,50.31 53.31,49.48 arc45 53.21,49.26 53.21,47.99 | C9.1 C12.1 | C14.1 67.57,29.71 arc-45 67.12,29.89 v66.56,30.61 | C14.1 67.88,31.38 arc-90 C7.1 | C20.1 94.76,21.32 arc45 94.98,21.42 XBEE.1 103.92,25.16 arc-45 104.14,25.07 105.13,24.08 arc-45 105.22,23.86 XLED2.AN arc-45 XLED2.AN 105.67,19.84 arc-45 105.77,19.61 105.77,17.7 arc45 105.86,17.47 106.31,17.02 arc-45 106.4,16.8 106.4,9.38 arc-45 106.31,9.16 XLED3.AN | PROG.VDD 67.09,24.66 arc45 67.18,24.88 67.18,28.43 arc-45 67.28,28.66 67.79,29.17 arc45 67.88,29.39 C14.1 | XLED1.AN 104.06,6.78 arc-45 104.15,7 XLED3.AN | 105.77,8.75 arc-45 105.67,8.52 XLED3.AN
  Top 1.016: C4.1 57.77,33.77 arc45 58.67,34.14 v58.93,34.4 59.69,35.17 arc45 59.94,35.78 59.94,39.1 arc90 59.05,39.99 58.8,39.99 arc-90 C15.1 | C11.1 69.38,53.24 arc-90 70.48,54.34 74.54,54.34 arc-45 74.99,54.16 76.9,52.25 | 77.09,52.06 76.9,52.25 | C9.1 82.97,41.98 arc-45 83.19,41.89 v83.57,41.52 84.71,40.37 84.71,34.02 83.69,33.01 83.69,31.36 84.45,30.59 v80.26,30.59 | v52.7,18.78 52.7,21.2 52.7,22.15 v52.7,23.1 | v77.09,48.12 77.09,52.06 | 77.09,52.06 arc90 76.9,52.25
  Bottom 0.508: JP4.1 154.73,35.63 arc-90 155.57,34.79 155.57,5.96 arc90 v155.7,5.83 | v52.7,18.78 51.78,17.86 arc45 51.69,17.64 v51.69,12.18 | v45.21,19.67 41.79,19.67 arc45 41.56,19.58 v40.89,18.91 | 79.25,30.59 79.25,30.34 | 79.25,30.34 79.88,30.34 | 79.25,30.34 78.61,30.34 | v56.52,9.51 v51.69,9.51 | 98.77,25.2 arc-90 XBEE.1 arc-90 XBEE.1 98.72,26.09 arc90 98.4,26.4 89.28,26.4 arc-90 88.77,26.91 88.77,28.94 arc45 88.68,29.16 88.2,29.64 v87.74,30.17 | 77.74,30.6 arc90 77.67,30.53 arc90 77.66,30.52 77.66,29.6 arc-90 78.5,30.35 78.52,30.4 arc91 78.42,30.42 76.73,30.34 arc-90 77.67,29.34 v77.67,23.6
  Bottom 0.61: v16.83,13.6 14.88,13.6 arc45 R1.2
  Bottom 1.016: v83.57,41.52 78.36,41.52 arc-90 77.09,42.79 v77.09,48.12 | 63,30.59 v66.56,30.61 75.96,30.6 77.74,30.6 79.25,30.59 v80.26,30.59 | 63,30.59 arc-45 62.55,30.78 v58.93,34.4 | v52.7,23.1 arc-45 52.8,23.32 59.98,30.5 arc-45 60.2,30.59 63,30.59
  pour Top (no thermals): 48.26,35.8 49.77,35.8 arc-45 50.22,35.62 51.56,34.28 53.59,34.28 arc45 54.03,34.46 54.1,34.53 55.75,34.53 arc-90 55.88,34.4 55.88,33.13 arc-90 55.75,33.01 54.36,33.01 arc-45 53.92,33.19 53.85,33.26 51.69,33.26 51.57,33.26 arc-45 51.12,33.45 50.16,34.4 48.26,34.4 48.26,35.67
  pour Top (no thermals): 48.26,35.8 45.09,35.8 arc-45 44.64,35.99 43.81,36.82 41.91,36.82 41.91,33.26 43.69,33.26 44.64,34.22 arc-45 45.09,34.4 48.13,34.4
3.3V1  (via drill 0.6)
  Top 0.254: U$2.26 216.29,25.3 arc90 C53.1 | 204.86,27.61 IMU2.8 204.86,27.32 | 204.86,27.61 arc-90 C58.1 arc-90 204.04,26.55 204.04,26.49 | 205.1,27.18 arc90 205.36,27.44 | 205.1,27.18 204.95,27.18 arc-90 204.86,27.27 204.86,27.61 | IMU2.13 209.66,29.23 arc90 C60.1 | 201.02,18.27 arc-90 C56.1 201.44,17.84 arc42 201.65,17.76 U$2.38 | C55.1 219.33,8.95 arc90 219.01,9.27 217.61,9.27 arc-90 217.3,9.59 U$2.57 arc90 U$2.57 | 204.22,26.67 204.04,26.49 | 204.04,26.49 203.96,26.42 | C54.1 224.75,18.76 arc90 224.28,18.29 224.28,17.53 arc-90 224.03,17.27 222.75,17.27 arc90 U$2.10 | 227.67,23.62 C49.1 arc45 227.65,23.69 220.2,23.69 arc45 219.97,23.59 219.89,23.51 arc45 219.79,23.28 U$2.19 | 205.36,27.44 IMU2.9 | 205.1,27.18 arc90 205.36,27.44 | v201.49,30.26 201.86,30.64 arc-45 202.08,30.73 IMU2.3
  Top 0.508: 198.29,18.29 C51.1 arc90 198.21,18.54 189.2,27.55 arc-45 189.1,27.78 v189.1,31.75 | D15.8 199.6,41.27 C69.1 arc90 199.68,41.27 202.31,41.27 arc-90 203.07,40.51 R42.2 R43.2 207.23,37.48 | 208.66,37.48 207.23,37.48 | 214.63,34.04 210.64,37.41 arc40 210.44,37.48 208.66,37.48 | 215.77,33.78 216.59,34.35 210.39,40.55 arc45 210.17,40.64 v204.34,40.64 | 199.1,18.54 arc-90 199.26,18.38 | 204.22,26.67 204.22,24.89 arc-90 v203.58,24.26 | 208.66,37.48 arc-90 207.9,38.24 | v207.9,39.12 207.9,38.15 arc-90 207.23,37.48 | C49.1 228.98,23.66 arc45 229.2,23.75 v230.38,24.93 | v198.12,34.44 192.64,34.44 arc-45 192.41,34.54 v192.15,34.8 | JP22.2 198.17,0.73 arc45 198.39,0.64 204.21,0.64 arc45 204.44,0.73 v207.39,3.68
  Top 0.762: USER.1 193.47,17.58 arc-90 194.44,18.54 199.1,18.54 | C55.1 C50.1 226,8.22 arc90 226.64,8.87 226.64,8.69 arc-90 226.2,8.24 226.92,8.24 arc-90 226.95,8.22 arc90 R35.1 | C43.1 C54.1 229.07,18.76 arc90 v230.38,20.07 | v228.47,35.18 arc-90 227.58,34.29 220.85,34.29 | 226.44,10.07 arc-90 224.58,8.22
  Top 1.016: SW1.6 SW1.1 222.07,35.51 arc-90 220.85,34.29 218.18,34.29 | C53.1 C52.1 arc-90 215.64,29.12 C57.1 arc-90 218.18,34.29 | C51.1 199.26,18.38 C56.1 | C60.1 210.99,29.63 214.63,34.04 217.93,34.04 arc90 217.94,34.05 | 215.01,33.78 215.77,33.78 216.79,33.78 216.92,33.91 217.8,33.91 217.94,34.05 | 217.94,34.05 218.18,34.29 | R35.1 arc-90 226.44,10.07 v226.44,13.08 | v230.38,31.37 v230.38,24.93
  Bottom 0.254: v201.49,30.26 arc45 201.46,30.25 200.64,29.43 arc-45 200.67,29.72 200.27,29.85 | 200.51,29.3 arc90 200.66,29.15 201.08,29.15 | 201.08,29.15 arc90 201.27,28.96 201.68,28.96 | 200.27,29.85 200.28,29.85 | 201.01,29.81 arc-45 200.27,29.85 | 201.01,29.81 200.92,29.6 arc45 200.95,29.5 201.08,29.15 | 201.01,29.81 201.42,30.23
  Bottom 0.508: v207.9,39.12 arc90 207.64,39.37 200.91,39.37 arc90 199.77,38.23 199.77,30.86 arc90 201.68,28.96 201.93,28.96 arc-90 203.58,27.3 v203.58,24.26 | USER.1 195.63,11.81 arc-45 195.72,11.59 195.72,6.24 arc-45 195.63,6.02 192.24,2.63 arc45 192.15,2.41 192.15,1.4 193.42,1.4 | 178.69,1.27 187.58,1.27 | 187.58,1.27 193.29,1.27 | 193.29,1.27 193.82,1.27 | 178.69,1.27 171.09,1.27 arc-45 170.86,1.36 JP21.2 | 178.69,1.27 178.04,1.92 arc-45 177.94,2.15 JP19.2 | 187.58,1.27 186.93,1.92 arc-45 186.83,2.15 JP20.2 | 193.42,1.4 193.81,1.4 arc45 194.04,1.49 JP22.2 | 193.29,1.27 193.42,1.4 | 230.47,25.02 arc90 v230.38,24.93 230.54,24.77 arc-45 230.63,24.55 230.63,24.23 | v204.34,40.64 199.9,40.64 arc90 198.5,39.24 198.5,34.67 arc-90 v198.12,34.44 | v189.1,31.75 v192.15,34.8 | JP29.1 210.3,6.46 arc45 210.08,6.37 v207.39,3.68
  Bottom 1.016: v230.38,24.93 v230.38,20.07 arc90 226.44,16.13 v226.44,13.08 230.16,9.36 arc45 230.38,9.27 234.44,9.27 arc45 234.66,9.36 236.63,11.34 arc-45 236.86,11.43 PROG_1.VDD | v228.47,35.18 arc-90 230.38,33.27 v230.38,31.37
3HO
  pour Top (no thermals): 135.13,36.82 136.27,36.82 arc-90 136.52,36.56 136.52,35.55 arc-90 136.4,35.42 136.14,35.42 arc90 136.02,35.29 136.02,33.13 arc-90 135.89,33.01 135.13,33.01 arc-90 135,33.13 135,35.17 arc90 134.75,35.42 133.98,35.42 arc-90 133.73,35.67 133.73,36.69 arc-90 133.86,36.82
3HS  (via drill 0.6)
  Top 0.508: MD1.15 113.15,43.29 arc-45 113.38,43.2 115.22,41.36 arc45 115.45,41.26 119.76,41.26 arc-90 120.02,41.01 120.02,40.08 arc90 C34.1 123.69,39.99 arc-45 123.92,39.9 v124.33,39.48
  Bottom 0.508: D6.C 132.29,39.39 arc45 132.07,39.48 v124.33,39.48
  pour Bottom (no thermals): 148.97,50.79 arc-90 151.64,50.79 arc-90 151.64,47.87 arc-90 148.97,47.87 arc-90
  pour Top (no thermals): 148.97,50.79 arc-90 151.64,50.79 arc-90 151.64,47.87 arc-90 148.97,47.87 arc-90
  pour Bottom (no thermals): 132.21,31.99 130.17,31.61 130.17,26.78 arc90 130.43,26.53
  pour Bottom (no thermals): 130.05,26.91 arc90 130.56,26.4
  pour Bottom (no thermals): 136.78,35.8 136.4,35.8 arc90 136.02,35.42 136.02,32.63 arc-90 135.51,32.12 130.3,32.12 arc90 130.05,31.86 130.05,26.78 arc90 130.56,26.28 140.08,26.28 arc90 141.1,27.29 141.1,41.77 arc-90 144.14,44.82 151.13,44.82 arc90 152.15,45.83 152.15,49.39 arc90 151.76,49.77 148.72,49.77 arc90 148.46,49.52 148.46,48.63 arc-90 148.08,48.25 139.19,48.25 arc90 138.05,47.1 138.05,36.06 arc-90 137.67,35.67
  pour Top (no thermals): 135.13,42.02 133.98,42.02 arc90 133.35,41.39 133.35,39.61 arc90 133.86,39.1 139.95,39.1 arc90 140.72,39.87 140.72,41.26 arc-90 144.27,44.82 150.88,44.82 arc90 152.15,46.09 152.15,49.52 arc90 152.02,49.64 148.84,49.64 arc90 148.34,49.14 148.34,48.63 arc-90 147.83,48.12 139.32,48.12 arc90 137.92,46.72 137.92,42.53 arc-90 137.41,42.02
  pour Top (no thermals): 133.35,40.88 133.35,43.17 arc-90 133.73,43.55 136.78,43.55 arc90 137.03,43.8 137.03,47.49 arc-90 137.54,47.99 139.06,47.99 arc-90 139.83,47.23 139.83,39.61 arc-90 139.45,39.23 133.73,39.23 arc-90 133.35,39.61
  pour Top (no thermals): 137.03,46.09 151,46.47 arc-90 150.62,46.09 138.94,46.09 arc90 138.18,45.33
  pour Bottom (no thermals): 138.05,45.45 151.38,48.63 151.38,45.83 arc-90 151.13,45.58 151.13,45.45 150.24,45.45
  pour Bottom (no thermals): 138.05,39.75 138.05,37.79 arc-45 137.96,37.56 135.99,35.6 135.99,34.87 arc45 136.08,34.64 136.46,34.26 138.54,34.26 arc45 138.76,34.36 139.56,35.15 139.56,38.87 arc45 139.47,39.09 138.84,39.73
  pour Bottom (no thermals): 135.99,35.08 135.99,42.44 arc-90 136.47,42.93 137.63,42.95 arc-90 138.85,42.66 138.85,35.73 arc-90 138.16,35.04
3LO
  pour Bottom (no thermals): 126.62,27.67 127.89,27.67 arc-90 128.14,27.42 128.14,26.53 arc-90 127.89,26.28 124.97,26.28 arc90 124.71,26.02 124.71,25.13 arc-90 124.46,24.88 123.95,24.88 arc-90 123.83,25.01 123.83,27.8 arc90 123.7,27.93 123.7,28.56 124.46,28.56 arc-90 124.59,28.44 arc90 125.35,27.67
5V
  Top 0.508: JP25.3 238.36,44.72 arc-90 239.9,43.18 | 239.9,44.72 239.9,43.18 | 239.9,45.72 239.9,44.72 | 239.9,44.72 JP25.3 | 239.9,43.18 239.9,36.62 arc-90 R37.2
  Top 0.61: JP25.3 238.9,44.72 arc90 239.9,45.72 239.9,49.53 arc90 238.63,50.8 230.88,50.8 arc90 C45.1
  Top 1.016: 223.18,48.48 C46.+ 228.45,48.48 arc45 228.63,48.55 C45.1
  Top 1.27: 222.35,48.03 221.59,48.03 220.47,49.15 | 222.35,48.03 P4.3 | 222.35,48.03 221.93,48.45 221.96,48.48 223.18,48.48
  Top 2.54: P3.7 210.56,46.99 arc45 210.79,47.08 214.41,50.71 arc-45 214.63,50.8 219.45,50.8 arc-45 219.68,50.71 221.93,48.45
  Bottom 0.508: JP24.3 179.94,36.56 arc90 181.48,38.1 181.48,50.8 arc-90 182.75,52.07 197.86,52.07 arc-45 198.09,51.98 P3.7
5V1  (via drill 0.6)
  Top 0.508: C38.1 19.79,28.22 arc90 U$61.8 v22.23,28.69 | C29.1 arc90 93.76,52.69 93.76,51.07 arc-90 93.34,50.28 U$46.16 93.47,50.28 arc90 93.76,50.57 93.76,51.01 arc90 94.23,50.28 | v74.04,72.63 93.83,72.63 arc-45 94.06,72.54 100.07,66.53 | C27.1 arc45 102.87,71.65 U$47.4
  Top 1.016: C29.1 94.15,58.06 arc-45 94.33,58.51 99.64,63.81 arc45 99.82,64.26 99.82,66.28 100.07,66.53 arc-45 100.52,66.71 U$47.4
  Bottom 0.508: v74.04,72.63 53.97,72.63 arc90 52.58,71.23 52.58,65.14 arc-45 52.48,64.92 47.72,60.15 arc-45 47.49,60.06 30.23,60.06 arc45 30.01,59.97 16.6,46.56 arc45 16.51,46.34 16.51,43.42 arc90 17.65,42.28 21.84,42.28 arc-90 22.86,41.26 22.86,29.32 arc-90 v22.23,28.69
5V2  (via drill 0.6, 1.1)
  Top 0.508: 5.33,23.99 arc90 6.08,23.24 | 5.33,23.99 5.33,28.05 arc-90 5.97,28.69 14.35,28.69 arc-90 14.99,28.05 14.99,26.66 arc90 15.62,26.02 30.48,26.02 arc90 30.99,26.53 30.99,30.47 | 30.99,30.47 30.99,30.98 | 30.99,31.48 30.99,38.34 arc-90 31.62,38.98 48.51,38.98 48.51,39.87 arc-90 47.62,38.98 47.5,38.98 arc-90 P1.3 | U$61.3 29.12,31.23 arc-90 C37.1 | U$61.1 28.96,28.69 arc90 29.34,29.07 C37.1 | 30.99,30.47 arc90 30.48,30.98 arc90 30.99,31.48 | 30.99,30.98 30.99,31.48 | 30.99,30.98 arc90 30.95,31.01 C37.1 | R15.2 150.11,13.45 arc-90 v150.75,12.81 | v150.75,12.81 arc-90 150.11,12.18 | J5.5 153.7,10.81 arc90 153.42,10.53 153.42,9.77 arc-90 153.03,9.39 v150.75,9.39 R13.2 | 150.11,12.18 R14.2 | v150.75,12.81 arc-90 150.11,12.18 | v86.74,50.28 U$46.1 | v86.23,40.5 86.23,39.27 arc45 86.33,39.05 C30.1 | R23.2 5.75,17.6 arc-90 5.33,18.02 5.33,22.72 | 5.33,22.72 5.33,23.99 | 6.08,23.24 5.86,23.24 arc90 5.33,22.72 | 6.08,23.24 J2.2
  Top 0.762: v150.5,15.99 R22.2
  Top 1.016: 86.53,37.37 C30.1 | 86.53,37.37 arc-45 86.34,36.92 86.34,32.73 v85.6,31.99 | 86.53,37.37 86.53,36.65 arc90 87.38,35.8 92.96,35.8 arc-45 93.18,35.71 95.67,33.23 arc45 95.89,33.13 111.38,33.13 arc-90 112.4,32.12 112.4,22.59 arc90 114.94,20.05 135.13,20.05 arc-90 v135.25,19.93 arc45 134.95,20.05
  Top 1.524: C5.1 55.66,38.56 arc45 55.89,38.47 v57.4,38.47
  Bottom 0.508: v150.75,12.81 v150.75,9.39 | v86.74,50.28 87.03,49.99 arc-45 87.12,49.77 87.12,41.52 arc-45 87.03,41.3 v86.23,40.5
  Bottom 0.762: v150.5,15.99 150.38,15.99 arc45 149.93,15.8 146.94,12.81
  Bottom 1.016: v150.75,12.81 146.94,12.81 139.96,12.81 arc-45 139.73,12.91 135.35,17.29 arc-45 135.25,17.52 v135.25,19.93 | v85.6,31.99 64.78,31.99 arc-45 64.33,32.18 58.22,38.28 arc45 57.78,38.47 v57.4,38.47
  pour Top (no thermals): 48.26,37.07 48.26,43.04 arc-90 48.64,43.42 50.8,43.42 arc-90 51.05,43.17 51.05,41.01 arc-90 50.55,40.5 50.29,40.5 arc90 49.91,40.12 49.91,38.21 arc90 50.16,37.96 50.16,36.69 48.51,36.69 arc-90 48.26,36.94
  pour Top (no thermals): 49.4,38.09 51.18,38.09 arc45 51.4,38.18 51.56,38.34 52.45,38.34 arc45 52.67,38.43 54.1,39.87 55.88,39.87 55.88,38.47 54.1,38.47 53.18,37.55 arc-45 52.95,37.45 51.69,37.45 49.4,37.45
15V  (via drill 0.6)
  Top 0.508: C35.1 C36.1 108.17,54.44 arc-45 108.07,54.21 106.39,52.53 arc45 106.3,52.31 106.3,50.28 | v98.17,37.2 arc90 98.81,36.56 103.76,36.56 arc90 104.52,37.33 104.52,40.12 arc-90 104.9,40.5 105.79,40.5 arc90 106.3,41.01 106.3,49.14 | 106.3,49.14 106.3,50.28 | 106.3,50.28 arc90 106.93,49.64 | MD1.20 106.81,49.64 arc90 106.3,49.14 | R24.1 98.39,47.32 arc90 97.92,46.85 v97.92,45.07
  Top 1.016: U$47.5 109.59,68.42 arc-90 C28.1
  Bottom 0.508: v97.92,45.07 97.41,45.07 | v98.17,37.2 98.17,37.45 arc90 97.66,37.96
  other vias: 114.3,64.25 114.68,44.69 116.14,39.1
  pour Bottom (no thermals): 105.79,69.33 112.08,69.33 arc-90 112.4,69.01 112.4,59.23 arc90 112.71,58.92 115,58.92 arc-90 115.32,58.6 115.32,36.5 arc-90 115,36.18 98.04,36.18 96.01,38.21 96.01,45.64 arc-90 96.33,45.96 98.49,45.96 arc-90 98.81,45.64 98.81,39.87 98.81,37.58 98.93,37.58 99.7,36.82 112.59,36.82 arc90 112.9,37.13 112.9,56.95 arc90 112.59,57.26 111.82,57.26 arc-90 111.51,57.58 111.51,67.11 arc90 111.19,67.42 105.79,67.42
  pour Bottom (no thermals): 112.14,66.28 arc90 113.03,65.39 115.19,65.39 arc-90 115.82,64.76 115.82,63.61 arc-90 115.32,63.11 112.65,63.11 arc90 112.14,62.6 112.14,64.25
  pour Top (no thermals): 114.3,65.01 114.17,65.01 arc90 113.54,64.38 113.54,64.12 arc90 114.17,63.49 116.59,63.49 116.59,65.01 115.44,65.01
  pour Top (no thermals): 114.68,44.18 114.55,44.18 arc-90 114.17,44.56 114.17,44.82 arc-90 114.55,45.2 115.82,45.2 116.84,45.2 arc-90 116.97,45.07 116.97,44.06 arc-90 116.84,43.93 115.82,43.93 arc90 115.57,44.18 114.94,44.18
  pour Bottom (no thermals): 115.32,37.83 115.32,39.36 arc90
  pour Top (no thermals): 118.62,37.96 arc-90 118.87,37.71 118.87,36.94 arc-90 118.75,36.82 118.11,36.82
  pour Bottom (no thermals): 115.32,58.03 115.32,64.76 arc90 114.94,65.14 112.27,65.14 arc90 111.89,64.76 111.89,58.03 arc90 112.01,57.9
  pour Bottom (no thermals): 111.25,69.33 113.41,69.33 arc-90 113.67,69.08 113.67,66.66 arc90 113.92,66.41 115.32,66.41 arc-90 115.82,65.9 115.82,63.87 arc-90 115.32,63.36 112.14,63.36 arc-90 111.51,64 111.51,67.55 arc90 111.25,67.81 111.25,68.57 arc90 111.12,68.69
  pour Bottom (no thermals): 97.16,37.2 111.12,37.2 arc90 111.76,37.83 111.76,55.36 arc-90 112.78,56.38 113.41,56.38 arc-90 113.92,55.87 113.92,36.94 arc-90 113.16,36.18 99.31,36.31 arc-90
  pour Bottom (no thermals): 98.3,41.01 100.49,38.82 arc-45 100.58,38.59 100.58,36.69 98.04,36.69 97.88,36.85 arc-45 97.79,37.08 97.79,41.14
  pour Bottom (no thermals): 100.33,37.71 108.59,37.71 arc-90 109.09,37.2 108.97,37.2 arc90 108.2,36.44 98.3,36.44 arc-90 97.79,36.94 97.79,37.45 arc-90 98.17,37.83
  pour Bottom (no thermals): 116.71,39.1 arc90 116.2,39.74 115.19,39.74 115.19,38.47 116.2,38.47 arc90 116.71,38.98
  pour Top (no thermals): 118.87,38.34 117.99,38.34 arc-45 117.76,38.43 116.71,39.48 116.08,39.48 arc90 115.7,39.1 arc90 116.2,38.6 118.11,36.69 119,36.69 119,37.96
24V  (via drill 0.9)
  Top 0.254: D10.C D10.C arc-45 15.08,38.05 15.24,38.21
  Top 0.762: JP14.2 13.7,36.67 arc90 15.24,38.21 | 92.28,57.65 arc45 v92.58,57.77
  Top 1.016: D10.C 14.99,39.23 arc-90 16.51,40.75 20.32,40.75 arc90 21.59,42.02 21.59,53.2 arc-45 21.68,53.42 31.98,63.72 31.98,65.05 31.99,65.05 33.86,66.92 35.23,66.92 arc90 37.01,68.69 | v96.52,57.77 100.17,61.42 arc-45 100.62,61.61 U$47.1 arc90 106.79,61.49 C26.1 | U$75.S 32.52,73.28 arc90 U$77.C | 36.96,70.56 36.84,70.45 arc-90 37.25,70.04
  Top 1.905: JP12.2 J7.2 144.03,41.02 arc90 142.62,39.61 142.62,25.93 arc-45 141.88,24.14 140.57,22.83 arc-45 138.77,22.09 115.7,22.09 arc-90 114.43,23.36 114.43,33.26 arc90 112.78,34.91 96.65,34.91 91.8,39.76 arc-45 91.06,41.55 91.06,55.61 89.39,57.28 | CS2.7 arc90 68.48,70.73 73.53,70.73 arc-90 75.56,68.69 75.56,59.68 arc90 77.22,58.03 87.59,58.03 arc-45 89.39,57.28 | 92.28,57.65 89.75,57.65 arc90 89.39,57.28
  Bottom 1.016: v92.58,57.77 v96.52,57.77
  pour Top (no thermals): 35.41,77.57 66.04,77.58 arc-90 67.31,76.31 67.31,73.77 52.07,73.77 arc90 43.18,67.42 35.92,67.48 arc53
  pour Top (no thermals): 41.44,67.45 45.03,67.45 arc90 45.82,68.24 45.82,71.5 arc-90 46.28,71.96 50,71.96 arc90 50.32,72.28 50.32,73.44 arc-90 50.76,73.89 51.16,73.89 arc90 51.78,74.51 51.78,74.56 arc90 51.35,74.99 43.21,74.99 arc90 41.27,73.06
  pour Top (no thermals): 36.54,77.61 32.41,77.61 arc90 31.76,76.96 31.76,73.25 arc90 32.13,72.89 34.86,72.89 arc-90 35.13,72.62 35.13,67.78 arc90 35.38,67.53 37.55,67.53 arc90 38.07,68.05 38.07,76.77 arc90 37.36,77.48
24V1
  Top 1.016: P5.1 217.13,69.89 217.3,69.89 C62.1 arc90 221.4,68.45 C64.1 | D11.C 236.34,75.81 arc-90 JP26.1
  Top 1.27: 217.3,69.89 arc-90 217.42,69.76 217.42,67.06 arc-90 216.41,66.04 210.69,66.04 arc-90 208.15,68.58 208.15,75.06 arc90 206.63,76.58 202.81,76.58 | C64.1 224.53,68.45 arc45 224.75,68.54 227.62,71.41 arc45 227.71,71.63 227.71,73.66 arc-45 227.8,73.88 229.65,75.73 arc-45 229.87,75.82 233.53,75.82 arc-45 D11.C | 202.81,76.58 201.8,76.58 | 202.81,76.58 arc-90 U$42.A
  pour Bottom (no thermals): 172.59,77.47 203.33,77.6 arc-90 204.22,75.44 199.26,74.17 172.59,74.17 arc-90 171.32,74.93 171.32,76.2 arc-90
  pour Top (no thermals): 172.59,77.47 203.33,77.6 arc-90 204.22,75.44 199.26,74.17 172.59,74.17 arc-90 171.32,74.93 171.32,76.2 arc-90
CTS  (via drill 0.6)
  Top 0.254: v112.65,15.74 112.65,16.75 arc45 112.56,16.97 109.06,20.47 arc-45 108.97,20.69 108.97,29.83 arc90 108.59,30.21 89.41,30.21 arc-45 89.19,30.31 v88.01,31.48 | U$1.54 73.26,40.01 arc-45 73.04,40.11 v72.39,40.75 | XBEE.12 86.57,7.01 arc-45 86.8,7.1 v96.2,7.1 | v108.33,9.39 107.8,9.92 arc-45 107.71,10.14 v107.71,15.71
  Bottom 0.254: v88.01,31.48 86.2,33.3 arc45 85.98,33.39 81.18,33.39 arc-45 80.95,33.48 73.77,40.66 arc45 73.55,40.75 v72.39,40.75 | v96.2,7.1 105.91,7.1 arc45 106.14,7.19 v108.33,9.39 | v112.65,15.74 107.73,15.74 arc90 v107.71,15.71
FAULT
  Top 0.254: R12.1 68.17,56.5 arc45 C23.1 | CS2.13 68.3,56.95 arc-45 68.12,56.51 C23.1 | U$1.16 66.1,53.98 arc-45 66.19,54.2 C23.1
GND1  (via drill 0.6, 0.9)
  Top 0.254: U$47.PAD2 U$47.PAD
  Top 0.406: R34.2 28.93,64.52 v29.79,63.65
  Top 0.508: 20.83,32.5 21.59,32.5 arc-90 22.23,31.86 22.23,30.59 arc-90 21.59,29.96 U$61.7 17.06,29.96 arc90 C38.2 | U$46.9 arc-90 94.62,40.53 v94.62,40.12 | C29.2 v97.16,53.07 | v21.84,35.8 20.45,34.4 arc45 20.26,33.95 20.26,33.07 | 20.26,33.07 arc-90 19.69,32.5 | 20.83,32.5 U$61.5 | 20.83,32.5 arc-90 20.26,33.07 | C27.2 104.61,65.81 arc90 105.28,65.14 106.55,65.14 arc-90 U$47.3 | v103.38,58.03 arc-90 104.39,59.04 C35.2 C36.2 arc45 106.43,56.66 106.43,55.49 arc-45 106.33,55.27 105.63,54.56 arc45 105.54,54.34 105.54,49.14 | C31.1 100.12,42.57 arc90 100.58,43.04 arc-90 100.84,43.29 MD1.10 105.16,43.29 arc90 105.54,43.67 105.54,47.74 | 105.54,47.74 105.54,49.14 | 105.54,49.14 arc-90 104.78,48.37 | MD1.6 104.9,48.37 arc-90 105.54,47.74
  Top 0.762: M1.S 21.83,35.82 arc-90 v21.84,35.8
  Top 1.016: 107.91,65.01 arc90 C28.2 | 107.91,65.01 arc-90 109.6,63.32 C26.2 109.6,66.66 | U$47.3 107.91,65.01
  Bottom 0.406: 28.14,61.53 arc90 28.5,61.89 | 30.47,62.09 arc-90 29.79,62.76 | v29.79,63.65 29.79,62.84 arc-90 29.05,62.09
  Bottom 0.508: v94.62,40.12 arc90 95.12,40.63 95.12,48.76 | v97.16,53.07 97.16,53.45 arc-90 97.41,53.71 | v103.38,58.03 102.49,58.03
  Bottom 0.762: v21.84,35.8 21.84,39.99 arc90 21.08,40.75 16.38,40.75 arc-90 14.99,42.15 14.99,48.24 arc-45 15.08,48.47 28.14,61.53 28.61,62 arc-45 28.83,62.09 29.05,62.09 30.47,62.09 30.98,62.09 arc45 31.21,62.18 32.8,63.77 arc-45 33.02,63.87 34.41,63.87 arc-45 34.64,63.77 35.18,63.23
  Bottom 1.905: JP12.1 J7.1 143.88,43.02 arc90 142.62,41.77 142.62,25.93 arc-45 141.88,24.14 140.46,22.72 arc-45 138.93,22.09 115.7,22.09 arc-90 114.43,23.36 114.43,33.26 arc90 112.78,34.91 96.65,34.91 91.8,39.76 arc-45 91.06,41.55 91.06,55.61 89.39,57.28 arc45 87.59,58.03 77.22,58.03 arc-90 75.56,59.68 75.56,68.19 arc-90 77.34,69.96 arc90 78.61,71.23 78.61,74.92 arc-90 78.99,75.3 81.66,75.3 arc-90 82.55,74.41 82.55,70.73
  other vias: 116.33,69.84 117.98,68.31 119.38,69.84
  pour Bottom (no thermals): 30.99,66.79 11.94,66.79 arc-90 10.29,68.44 10.29,69.2 arc-90 12.06,70.98 17.61,70.98 arc45 19.85,71.91 25.15,77.2 116.59,77.2 arc-90 120.65,75.17 120.65,66.79 114.43,67.04 114.3,72.63 arc90 111.89,73.65 44.2,73.65 arc90 42.42,71.87 42.42,64.38 arc-90 40.77,62.73 32.77,62.73 arc-90 31.62,63.87 31.62,66.15 arc90
  pour Top (no thermals): 108.33,72.38 108.33,70.98 arc90 108.59,70.73 114.3,70.73 arc-90 114.3,70.35 114.3,67.3 arc90 114.3,67.04 120.65,67.04 arc90 120.65,67.3 120.65,72.38 arc90 120.65,72.5 108.46,72.5 arc90
  pour Bottom: 79.12,73.9 arc-90 80.14,70.47 80.14,59.68 92.84,59.68 arc-90 94.49,58.03 94.49,47.61 arc90 95.25,46.85 100.71,46.85 arc-90 101.47,46.09 101.47,38.6 arc90 101.98,38.47 107.06,38.47 107.06,54.6 110.49,58.66 110.49,66.79 105.41,66.79 arc-90 103.63,70.35 85.09,70.35 arc-90 85.09,74.16 79.25,74.16 arc90
  pour Bottom (no thermals): 117.6,69.71 arc90 117.98,69.33 118.24,67.04 arc-90 117.73,67.55
  pour Bottom (no thermals): 127.13,66.28 128.14,66.28 arc-90 128.4,66.03 128.4,65.01 arc-90 128.27,64.88 125.35,64.88 arc90 125.09,64.63 125.09,63.87 arc-90 124.97,63.74 124.33,63.74 arc-90 124.21,63.87 124.21,65.77 arc-90 124.59,66.15
  pour Bottom (no thermals): 127.13,49.64 128.14,49.64 arc-45 128.36,49.55 128.52,49.39 128.52,48.51 arc-45 128.43,48.28 128.4,48.25 125.73,48.25 arc90 125.35,47.87 125.35,47.36 arc-90 125.09,47.1 124.71,47.1 arc-90 124.46,47.36 124.46,47.99 arc-45 124.55,48.21 125.86,49.52
  pour Bottom (no thermals): 126.11,32.25 127.89,32.25 arc-90 128.14,31.99 128.14,31.1 arc-90 127.89,30.85 125.09,30.85 arc90 124.59,30.34 124.59,29.71 arc-90 124.46,29.58 123.83,29.58 arc-90 123.7,29.71 123.7,31.74 arc-90 124.21,32.25